# EAGLE board Data Logger 1 (EAGLE 9.6.2)
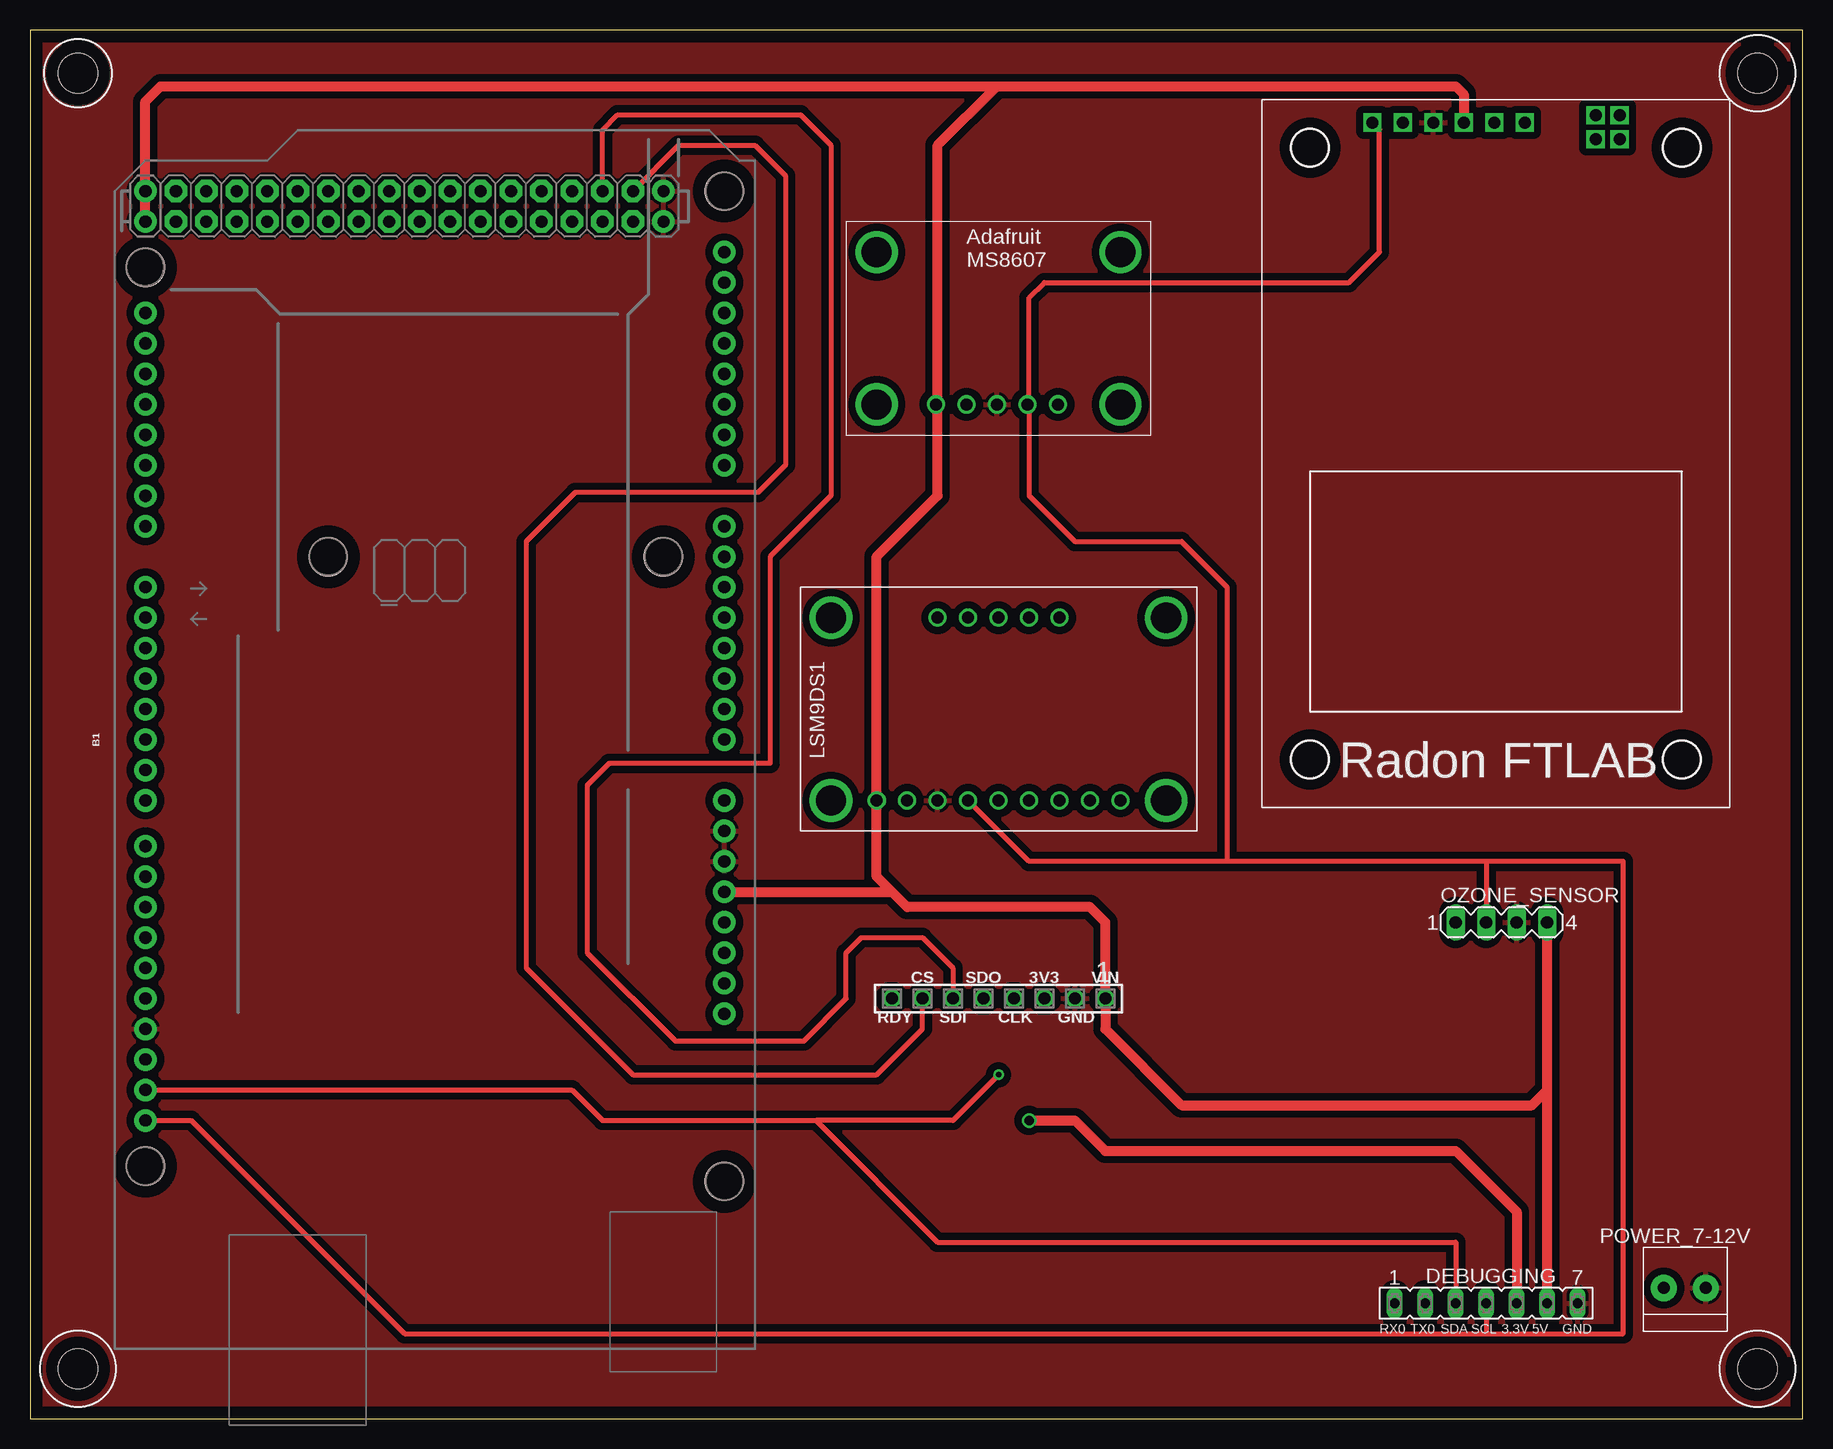
[diagram p0: board, top side]
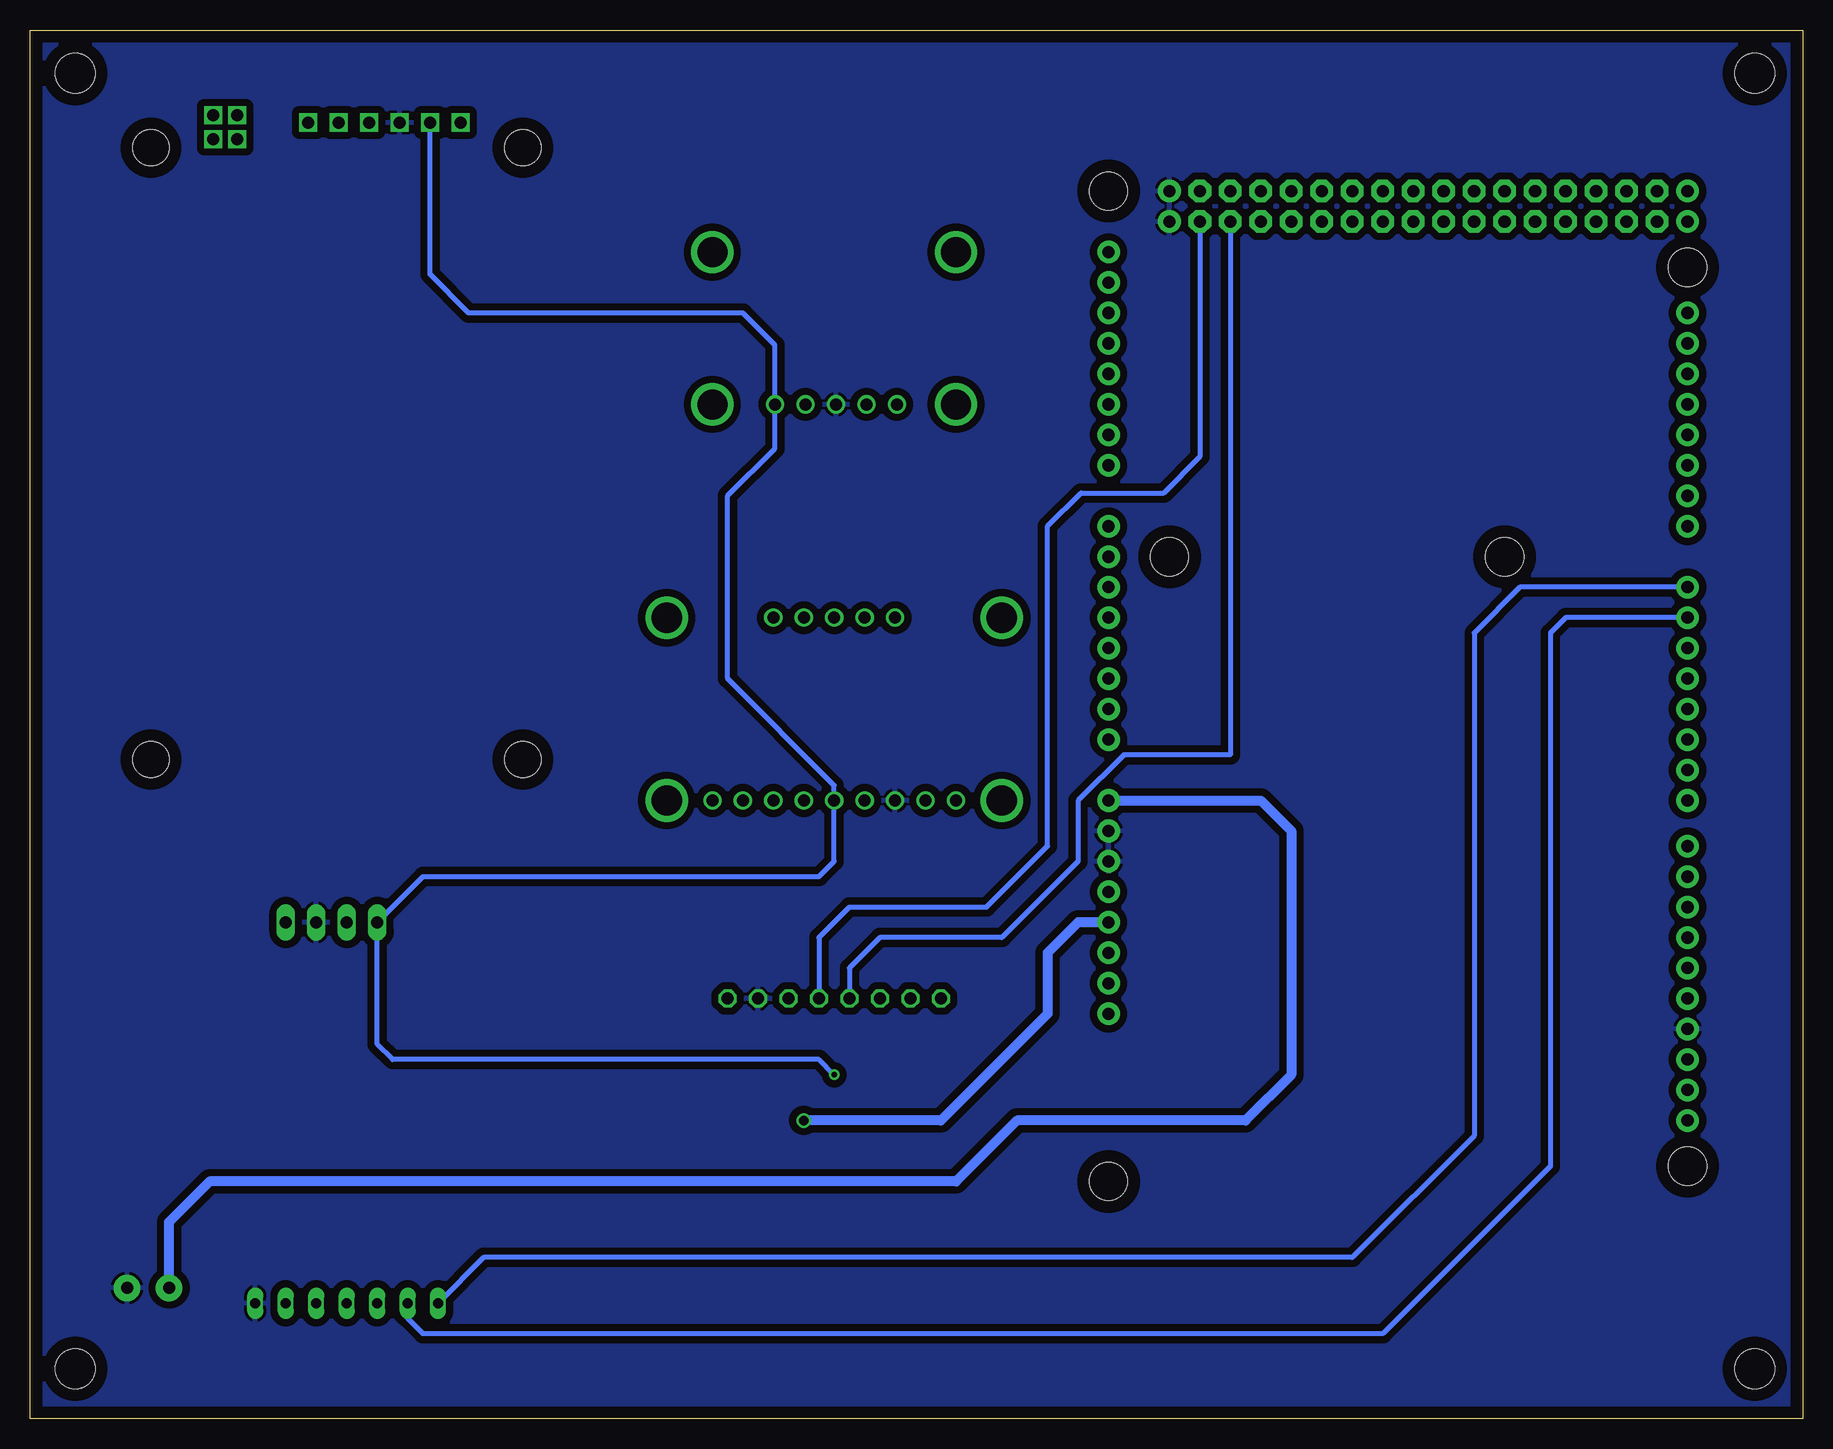
[diagram p1: board, bottom side, seen from below]

Size 147.78 x 115.76 mm. Coordinates in mm from the lower left corner, seen from the top.
Outline: 0,0 147.76,0 147.78,115.76 0,115.76 0,0
Copper layers (1*16): Top 0.035mm / dielectric 1.5mm / Bottom 0.035mm
Design rules "default": minimum track width 6mil, minimum drill 0.35mm, track to track 6mil, track to pad 6mil, pad to pad 6mil, via to via 6mil, smd to smd 6mil, copper to edge 40mil, drill to drill 6mil, minimum pad ring 10mil, minimum via ring 8mil, stop-mask expansion 4mil, vias tented up to drill 0mil, thermal gap 10mil
Holes 3.3 mm at 4,112.16 4,4.16 144,112.16 144,4.16

## Footprints (pad centres in the part's own frame; a part is rotated, then mirrored left to right if it is on the bottom)
ARDUINO_MEGA_NO_SILK = drill 1.016 pad 1.88: 0 13.97,24.13; 1 11.43,24.13; 2 8.89,24.13; 3 6.35,24.13; 3.3V -13.97,-24.13; 4 3.81,24.13; 5 1.27,24.13; 5V -11.43,-24.13; 5V@1 44.45,24.13; 5V@2 46.99,24.13; 6 -1.27,24.13; 7 -3.81,24.13; 8 -7.62,24.13; 9 -10.16,24.13; 10 -12.7,24.13; 11 -15.24,24.13; 12 -17.78,24.13; 13 -20.32,24.13; 14 19.05,24.13; 15 21.59,24.13; 16 24.13,24.13; 17 26.67,24.13; 18 29.21,24.13; 19 31.75,24.13; 20 34.29,24.13; 21 36.83,24.13; A0 1.27,-24.13; A1 3.81,-24.13; A2 6.35,-24.13; A3 8.89,-24.13; A4 11.43,-24.13; A5 13.97,-24.13; A6 16.51,-24.13; A7 19.05,-24.13; A8 24.13,-24.13; A9 26.67,-24.13; A10 29.21,-24.13; A11 31.75,-24.13; A12 34.29,-24.13; A13 36.83,-24.13; A14 39.37,-24.13; A15 41.91,-24.13; AREF -25.4,24.13; GND -8.89,-24.13; GND@1 -6.35,-24.13; GND@2 44.45,-19.05; GND@3 46.99,-19.05; GND@4 -22.86,24.13; IOREF -19.05,-24.13; NC -21.59,-24.13; RESET -16.51,-24.13; SCL -30.48,24.13; SDA -27.94,24.13; VIN -3.81,-24.13 | drill 1.016 pad 1.88 octagon: 22 44.45,21.59; 23 46.99,21.59; 24 44.45,19.05; 25 46.99,19.05; 26 44.45,16.51; 27 46.99,16.51; 28 44.45,13.97; 29 46.99,13.97; 30 44.45,11.43; 31 46.99,11.43; 32 44.45,8.89; 33 46.99,8.89; 34 44.45,6.35; 35 46.99,6.35; 36 44.45,3.81; 37 46.99,3.81; 38 44.45,1.27; 39 46.99,1.27; 40 44.45,-1.27; 41 46.99,-1.27; 42 44.45,-3.81; 43 46.99,-3.81; 44 44.45,-6.35; 45 46.99,-6.35; 46 44.45,-8.89; 47 46.99,-8.89; 48 44.45,-11.43; 49 46.99,-11.43; 50 44.45,-13.97; 51 46.99,-13.97; 52 44.45,-16.51; 53 46.99,-16.51 | hole 3.175: -34.29,24.13; 16.51,8.89; 16.51,-19.05; -35.56,-24.13; 46.99,-24.13; 40.64,24.13
FE07 = drill 0.813 long: 1 -7.62,0; 2 -5.08,0; 3 -2.54,0; 4 0,0; 5 2.54,0; 6 5.08,0; 7 7.62,0
MA04-1 = drill 1.016 long: 1 -3.81,0; 2 -1.27,0; 3 1.27,0; 4 3.81,0
1X2-3.5MM = drill 1 pad 2.184: 1 1.8,0; 2 -1.7,0
ADAFRUIT_MS8607 = drill 2.5: P$1 2.54,2.54; P$2 22.86,2.54; P$3 22.86,15.24; P$4 2.54,15.24 | drill 1: P$5 7.48,2.54; P$6 10.02,2.54; P$7 12.56,2.54; P$8 15.1,2.54; P$9 17.64,2.54
FTLAB_GAMMA_SENSOR_MODULE = drill 1 square: 1 17.1,1.9; 2 19.64,1.9; 3 22.18,1.9; 4 24.72,1.9; 5 27.26,1.9; 6 29.8,1.9; A0_1 9.2,3.3; A0_2 9.2,1.3; A1_1 11.2,3.3; A1_2 11.2,1.3 | hole 3: 4,55; 35,55; 4,4; 35,4
ADAFRUIT_LSM9DS1 = drill 1: 1 6.35,2.54; 2 8.89,2.54; 3 11.43,2.54; 4 13.97,2.54; 5 16.51,2.54; 6 19.05,2.54; 7 21.59,2.54; 8 24.13,2.54; 9 26.67,2.54; 10 11.43,17.78; 11 13.97,17.78; 12 16.51,17.78; 13 19.05,17.78; 14 21.59,17.78 | drill 2.54: P$1 2.54,2.54; P$2 30.48,2.54; P$3 30.48,17.78; P$4 2.54,17.78
SSW-108-02-G-S = drill 1 pad 1.5 octagon: 1 -8.89,0; 2 -6.35,0; 3 -3.81,0; 4 -1.27,0; 5 1.27,0; 6 3.81,0; 7 6.35,0; 8 8.89,0

## Placement (x,y rotation side)
B1  ARDUINO_MEGA_R3FULL  [ARDUINO_MEGA_NO_SILK]  33.75,55.34 90 top
DEBUGGING  [FE07]  121.38,9.62 0 top
OZONE_SENSOR  OZONE_SENSOR  [MA04-1]  122.65,41.37 0 top
POWER_7-12V  1X2-3.5MM  [1X2-3.5MM]  137.89,10.89 0 top
PRESSURE_SENSOR  ADAFRUIT_MS8607  [ADAFRUIT_MS8607]  68.04,82.01 0 top
U$1  FTLAB_GAMMA_SENSOR_MODULETHROUGH_HOLE  [FTLAB_GAMMA_SENSOR_MODULE]  141.7,109.95 180 top
U$2  ADAFRUIT_LSM9DS1  [ADAFRUIT_LSM9DS1]  64.23,48.99 0 top
X3  Temperature Sensor Amplifier  [SSW-108-02-G-S]  80.74,35.02 180 top

## Library data of the parts
B1 = SparkFun-Boards
DEBUGGING = con-lsta; OC_FARNELL: unknown; OC_NEWARK: unknown
OZONE_SENSOR = con-lstb; OC_FARNELL: unknown; OC_NEWARK: unknown
POWER_7-12V = adafruit
PRESSURE_SENSOR = Adafruit MS8607
U$1 = FTLAB-Gamma-Sensor-Module
U$2 = Adafruit LSM9DS1
X3 = con-samtec; MF: Samtec Inc.; MPN: SSW-108-02-G-S; OC_FARNELL: unknown; OC_NEWARK: 11P9448

## Nets
3.3V: B1.3.3V DEBUGGING.5
5V: B1.5V B1.5V@1 B1.5V@2 DEBUGGING.6 OZONE_SENSOR.4 PRESSURE_SENSOR.P$5 U$1.3 U$2.1 X3.1
CLK: B1.52 X3.4
CS: B1.53 X3.7
GND: B1.GND B1.GND@1 B1.GND@2 B1.GND@3 B1.GND@4 DEBUGGING.7 OZONE_SENSOR.3 POWER_7-12V.1 PRESSURE_SENSOR.P$7 U$1.4 U$2.3 X3.2
RX0: B1.0 DEBUGGING.1
SCL1: B1.SCL DEBUGGING.4 OZONE_SENSOR.2 PRESSURE_SENSOR.P$8 U$1.6 U$2.4
SDA1: B1.SDA DEBUGGING.3 OZONE_SENSOR.1 PRESSURE_SENSOR.P$9 U$1.5 U$2.5
SDI: B1.51 X3.6
SDO: B1.50 X3.5
TX0: B1.1 DEBUGGING.2
VIN: B1.VIN POWER_7-12V.2

## Tracks (layer width: path | path; a pad name or v marks a point on that pad's centre or on a via)
3.3V  (via drill 0.8)
  Top 0.813: v83.28,24.86 87.09,24.86 89.63,22.32 118.84,22.32 123.92,17.24 DEBUGGING.5
  Bottom 0.813: B1.3.3V 60.42,41.37 62.96,38.83 62.96,33.75 71.85,24.86 v83.28,24.86
5V
  Top 0.813: 126.46,27.4 125.19,26.13 95.98,26.13 89.63,32.48 X3.1 89.63,41.37 88.36,42.64 73.12,42.64 71.85,43.91 | 126.46,27.4 OZONE_SENSOR.4 | 71.85,43.91 70.58,45.18 U$2.1 70.58,71.85 75.66,76.93 75.66,84.41 PRESSURE_SENSOR.P$5 75.66,84.69 75.66,106.14 80.59,111.07 | 80.59,111.07 118.84,111.07 119.52,110.39 U$1.3 | DEBUGGING.6 126.46,27.4 | B1.5V 71.85,43.91 | B1.5V@1 B1.5V@2 9.62,109.8 10.89,111.07 80.59,111.07
CLK
  Bottom 0.406: B1.52 50.26,80.18 53.26,77.17 60.17,77.17 62.96,74.39 62.96,47.72 68.04,42.64 79.47,42.64 82.01,40.1 X3.4
CS
  Top 0.406: X3.7 74.39,32.48 70.58,28.67 50.26,28.67 41.37,37.56 41.37,73.12 45.45,77.2 60.69,77.2 62.96,79.47 62.96,103.6 60.42,106.14 54.07,106.14 B1.53
GND
  pour Top (isolate 0.61): 0,115.76 147.78,115.76 147.78,0 0,0
  pour Bottom (isolate 0.61): 0,115.76 147.78,115.76 147.78,0 0,0
RX0
  Bottom 0.406: B1.0 23.59,69.31 27.4,65.5 27.4,23.59 37.56,13.43 109.95,13.43 DEBUGGING.1
SCL1
  Top 0.406: B1.SCL 13.43,24.86 31.21,7.08 121.38,7.08 | DEBUGGING.4 121.38,7.08 | 121.38,7.08 132.81,7.08 132.81,46.45 121.38,46.45 | 121.38,46.45 OZONE_SENSOR.2 | 121.38,46.45 99.79,46.45 | 99.79,46.45 83.28,46.45 U$2.4 | 99.79,46.45 99.79,69.31 95.98,73.12 87.09,73.12 83.28,76.93 83.28,84.41 PRESSURE_SENSOR.P$8 83.28,84.69 83.28,93.44 84.55,94.71 109.95,94.71 112.49,97.25 112.49,107.46 U$1.6
SDA1  (via drill 0.45)
  Top 0.406: DEBUGGING.3 118.84,14.7 75.66,14.7 65.5,24.86 | v80.74,28.67 76.93,24.86 65.5,24.86 | B1.SDA 45.18,27.4 47.72,24.86 65.5,24.86
  Bottom 0.406: v80.74,28.67 82.01,29.94 117.57,29.94 118.84,31.21 OZONE_SENSOR.1 115.03,45.18 82.01,45.18 80.74,46.45 U$2.5 80.74,52.8 89.63,61.69 89.63,76.93 85.68,80.88 PRESSURE_SENSOR.P$9 85.68,89.49 88.36,92.17 111.22,92.17 114.44,95.39 U$1.5
SDI
  Top 0.406: X3.6 76.93,37.56 74.39,40.1 69.31,40.1 68.04,38.83 68.04,35.02 64.5,31.48 53.8,31.48 46.45,38.83 46.45,52.8 48.28,54.63 61.69,54.63 61.69,71.85 66.77,76.93 66.77,106.14 64.23,108.68 48.99,108.68 47.72,107.41 B1.51
SDO
  Bottom 0.406: B1.50 47.72,55.34 56.61,55.34 60.42,51.53 60.42,46.45 66.77,40.1 76.93,40.1 79.47,37.56 X3.5
TX0
  Bottom 0.406: B1.1 19.78,66.77 21.05,65.5 21.05,21.05 35.02,7.08 115.03,7.08 116.3,8.35 DEBUGGING.2
VIN
  Bottom 0.813: POWER_7-12V.2 136.19,16.4 132.81,19.78 70.58,19.78 65.5,24.86 46.45,24.86 42.64,28.67 42.64,48.99 45.18,51.53 B1.VIN

## Text on the board
tPlace: CS | SDO | 3V3 | VIN | RDY | SDI | CLK | GND
tNames: RX0 | TX0 | SDA | SCL | 3.3V | 5V | GND